# EAGLE board PCB (EAGLE 9.7.0)
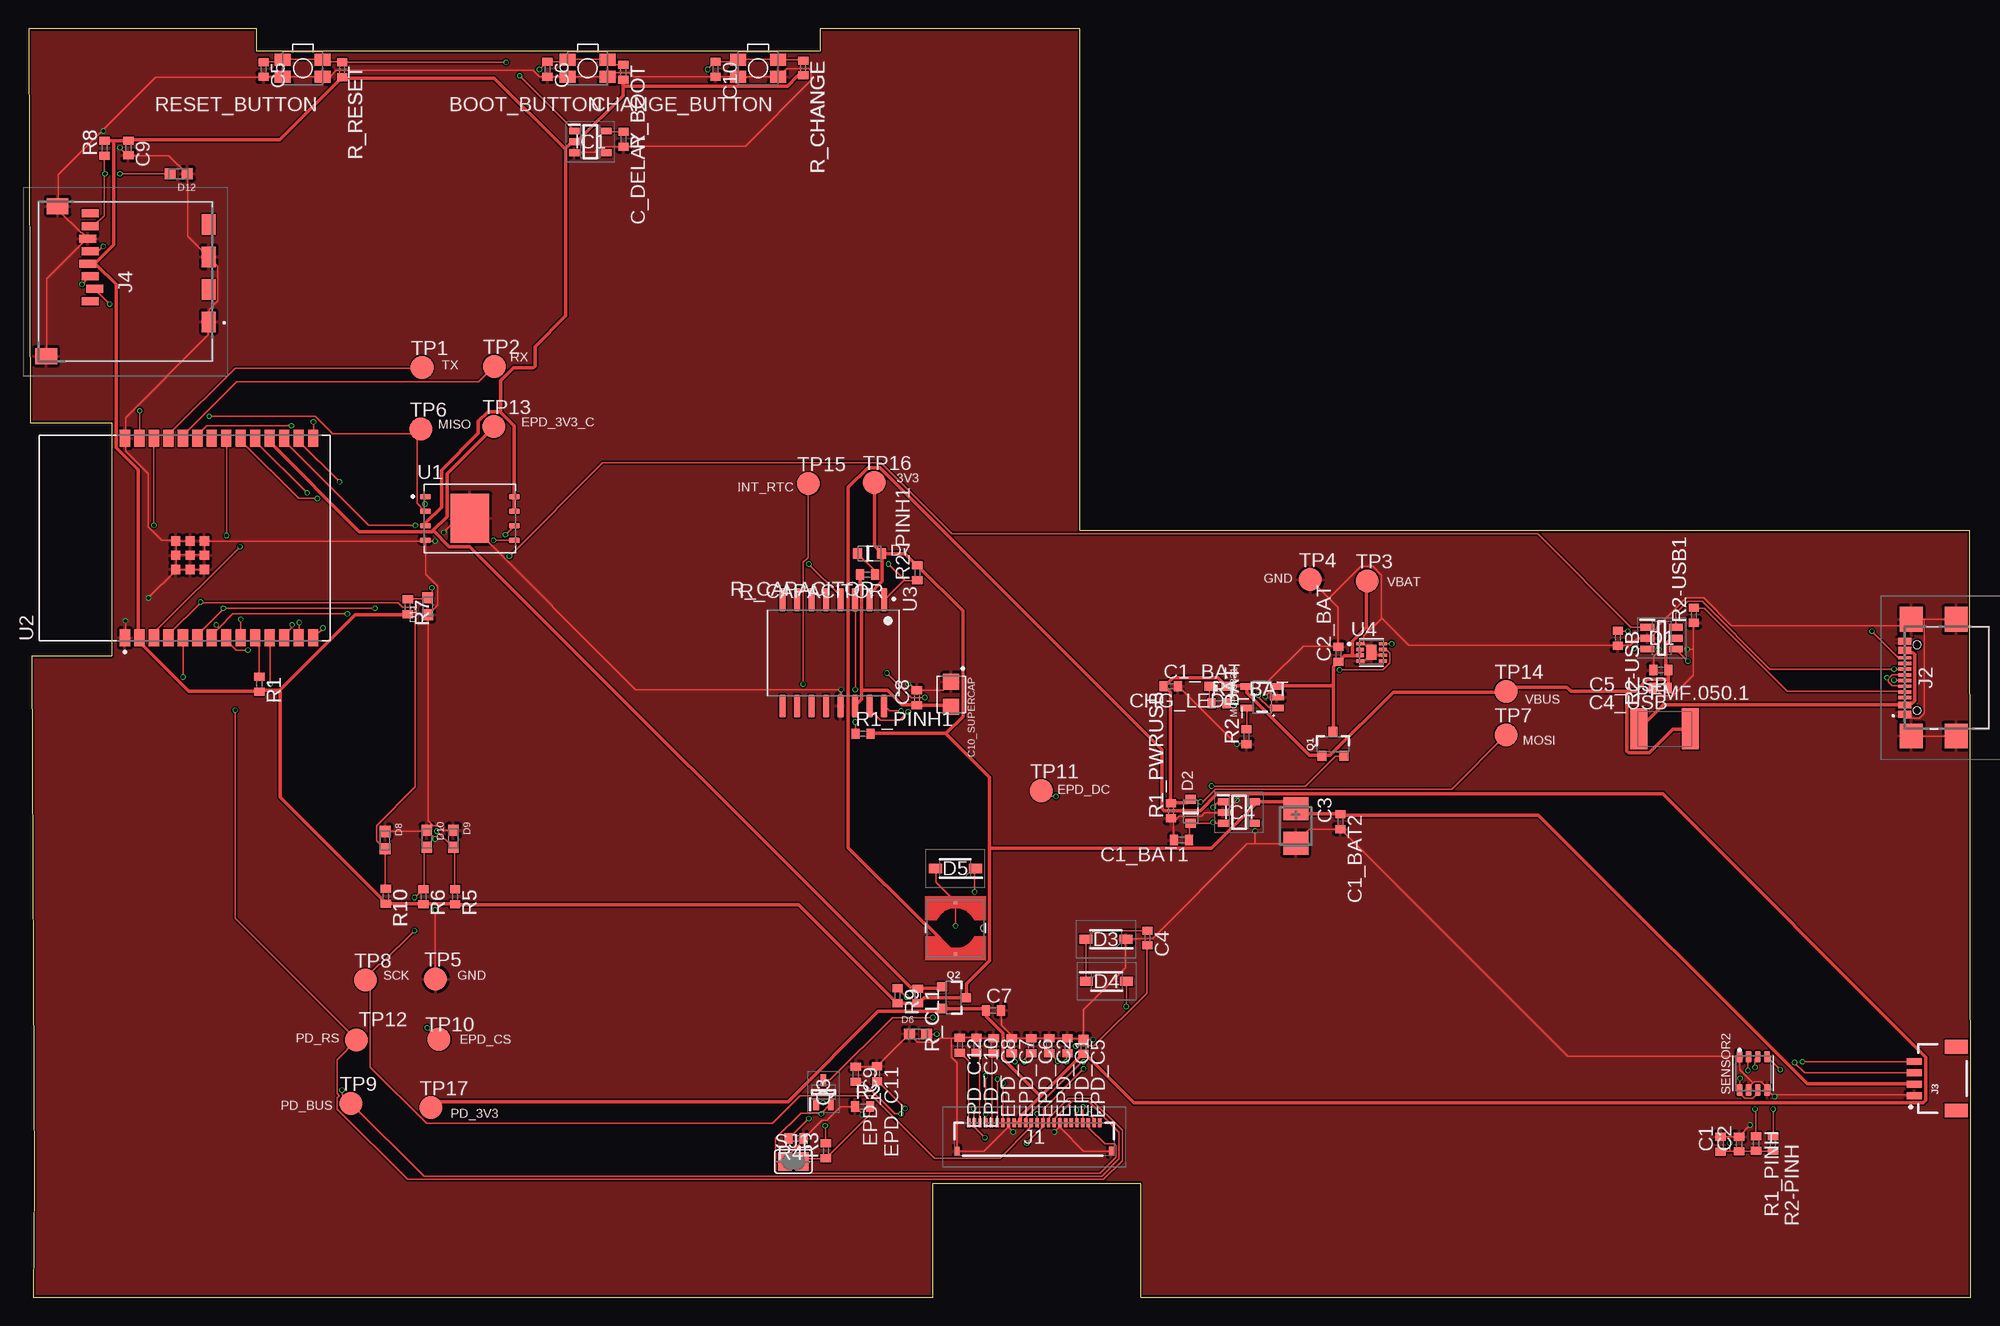
[diagram p0: board, top side]
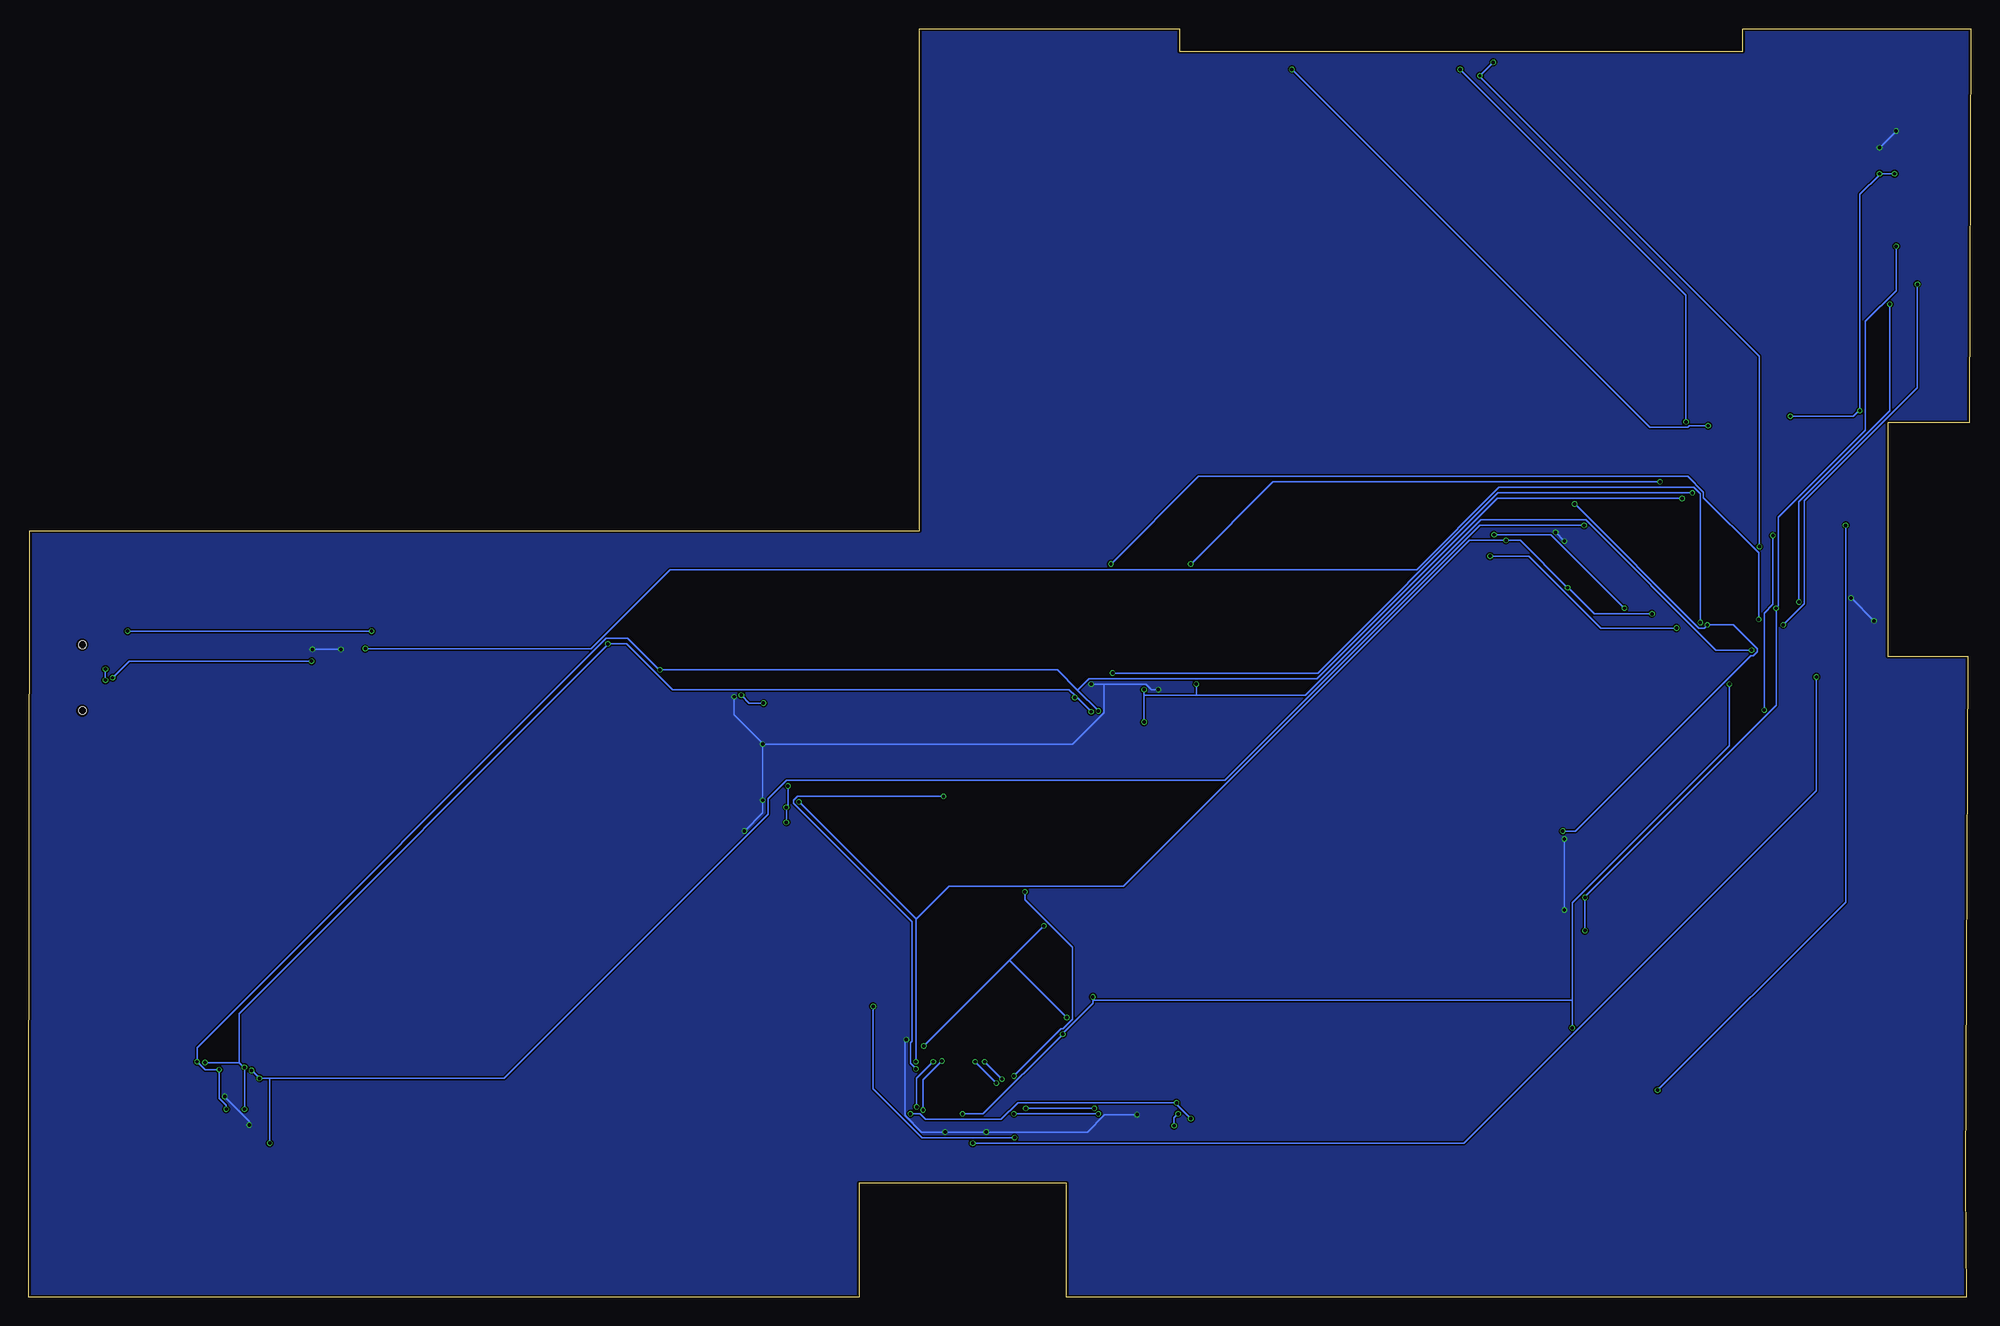
[diagram p1: board, bottom side, seen from below]

Size 170.3 x 111.2 mm. Coordinates in mm from the lower left corner, seen from the top.
Outline: 0.5,10 0.4,0 79.3,0 79.3,10 97.5,10 97.5,0 170.3,0 170.3,10 170.2,67.2 92.2,67.2 92.2,111.2 69.4,111.2 69.4,109.2 20,109.2 20,111.2 0,111.2 0.17,76.66 7.3,76.66 7.3,56.2 0.27,56.2 0.5,10
Copper layers (1*16): Top 0.035mm / dielectric 1.6mm / Bottom 0.035mm
Design rules "jlcpcb-2layers.dru": minimum track width 0.15mm, minimum drill 0.3mm, track to track 5mil, track to pad 5mil, pad to pad 5mil, via to via 5mil, smd to smd 5mil, copper to edge 0.2mm, drill to drill 6mil, minimum pad ring 10mil, minimum via ring 3mil, stop-mask expansion 4mil, vias tented up to drill 0mil, thermal gap 10mil
Net classes: 1 putere: width 0.3 mm

## Footprints (pad centres in the part's own frame; a part is rotated, then mirrored left to right if it is on the bottom)
MYBUTTON = smd 1.4 x 1.05: 1 1.75,0.75; 2 -1.75,0.75; 3 -1.75,-0.75; 4 1.75,-0.75
EAGLE-LTSPICE_C0402 = smd 0.7 x 0.9: 1 -0.65,0; 2 0.65,0
RCL_CT3528 = smd 2 x 2.2: + -1.5,0; - 1.5,0
CAPCP3225X100N = smd 1.4 x 1.4: 1 -1.1,0; 2 1.1,0
ADAFRUIT_CHIP-LED0603 = smd 0.8 x 0.8: A 0,-0.75; C 0,0.75
SOT95P280X145-6N = smd 1.2 x 0.6: 1 -1.25,0.95; 2 -1.25,0; 3 -1.25,-0.95; 4 1.25,-0.95; 5 1.25,0; 6 1.25,0.95
ESP32_WROVER_AVX---SD0805S020S1R0_AVX_SD0805S020S1R0_0 = smd 0.8 x 0.9: 1 -1.05,0; 2 1.05,0
SOD3716X135N = smd 1.15 x 0.8: 1 -1.75,0; 2 1.75,0
DIOC1608X36N = smd 0.97 x 0.94: 1 -0.75,0; 2 0.75,0
SOT95P280X125-5N = smd 0.9 x 0.6: 1 -1.4,0.95; 2 -1.4,0; 3 -1.4,-0.95; 4 1.4,-0.95; 5 1.4,0.95
SOT95P280X120-5N = smd 0.9 x 0.6: 1 -1.4,0.95; 2 -1.4,0; 3 -1.4,-0.95; 4 1.4,-0.95; 5 1.4,0.95
FH34SRJ24S05SH99 = smd 0.3 x 0.8: 1 5.75,1.45; 2 5.25,1.45; 3 4.75,1.45; 4 4.25,1.45; 5 3.75,1.45; 6 3.25,1.45; 7 2.75,1.45; 8 2.25,1.45; 9 1.75,1.45; 10 1.25,1.45; 11 0.75,1.45; 12 0.25,1.45; 13 -0.25,1.45; 14 -0.75,1.45; 15 -1.25,1.45; 16 -1.75,1.45; 17 -2.25,1.45; 18 -2.75,1.45; 19 -3.25,1.45; 20 -3.75,1.45; 21 -4.25,1.45; 22 -4.75,1.45; 23 -5.25,1.45; 24 -5.75,1.45 | smd 0.4 x 0.8: MP1 6.75,-1.05; MP2 -6.75,-1.05
SAMACSYS_PARTS_USB4110GFA = smd 0.3 x 1.15: A1 -3.35,3.678; A4 -2.55,3.678; A5 -1.25,3.678; A6 -0.25,3.678; A7 0.25,3.678; A8 1.25,3.678; A9 2.55,3.678; A12 3.35,3.678; B1 3.05,3.678; B4 2.25,3.678; B5 1.75,3.678; B6 0.75,3.678; B7 -0.75,3.678; B8 -1.75,3.678; B9 -2.25,3.678; B12 -3.05,3.678 | smd 2.18 x 2: MP1 -5.11,-0.827; MP2 5.11,-0.827; MP3 -5.11,3.103; MP4 5.11,3.103 | hole 0.65: -2.89,2.603; 2.89,2.603
JST04_1MM_RA = smd 0.6 x 1.35: 1 -1.5,0; 2 -0.5,0; 3 0.5,0; 4 1.5,0 | smd 1.2 x 2: NC1 2.8,-3.675; NC2 -2.8,-3.675
112ATAARR03ATTEND = smd 1.8 x 1.2: G1 10.6,10.4; G2 4.9,10.4; S1 7.75,10.4; S2 2.05,10.4 | smd 1.4 x 1.9: G3 13.6,-3.85; G4 0.45,-2.85 | smd 0.7 x 1.5: P1 8.8,0; P2 7.7,0.4; P3 6.6,0; P4 5.5,-0.2; P5 4.4,0; P6 3.3,-0.2; P7 2.2,0; P8 1.1,0
IND_4828-WE-TPC_WRE = smd 0.381 x 0.381: 1 -2.286,0; 2 2.286,0
ESP32_WROVER_SPARKFUN-IC-POWER_SOT23-5 = smd 0.55 x 1.2: 1 -0.95,-1.3; 2 0,-1.3; 3 0.95,-1.3; 4 0.95,1.3; 5 -0.95,1.3
ESP32C6_VARISTOR_CT/CN1812 = smd 1.5 x 3.6: 1 -2.25,0; 2 2.25,0
ESP32_WROVER_SPARKFUN-DISCRETESEMI_SOT23-3 = smd 0.8 x 0.9: 1 -0.95,-1; 2 0.95,-1; 3 0,1.1
SOT65P210X110-3N = smd 1.05 x 0.5: 1 -1.05,0.65; 2 -1.05,-0.65; 3 1.05,0
ESP32_WROVER_EAGLE-LTSPICE_R0402 = smd 0.7 x 0.9: 1 -0.65,0; 2 0.65,0
ESP32_WROVER_BME680_PSON80P300X300X100-8N = smd 1.016 x 0.5: 1 1.458,1.2; 2 1.458,0.4; 3 1.458,-0.4; 4 1.458,-1.2; 5 -1.458,-1.22; 6 -1.458,-0.4; 7 -1.458,0.4; 8 -1.458,1.2
SJ = smd 1.168 x 1.6: 1 -0.762,0; 2 0.762,0
TP20R = smd 2 x 2: TP 0,0
SON127P600X800X80-9N = smd 0.94 x 0.44: 1 -3.895,1.905; 2 -3.895,0.635; 3 -3.895,-0.635; 4 -3.895,-1.905; 5 3.895,-1.905; 6 3.895,-0.635; 7 3.895,0.635; 8 3.895,1.905 | smd 3.4 x 4.3: 9 0,0
XCVR_ESP32-C6-WROOM-1-N8 = smd 1.5 x 0.9: 1 -8.75,5.26; 2 -8.75,3.99; 3 -8.75,2.72; 4 -8.75,1.45; 5 -8.75,0.18; 6 -8.75,-1.09; 7 -8.75,-2.36; 8 -8.75,-3.63; 9 -8.75,-4.9; 10 -8.75,-6.17; 11 -8.75,-7.44; 12 -8.75,-8.71; 13 -8.75,-9.98; 14 -8.75,-11.25; 15 8.75,-11.25; 16 8.75,-9.98; 17 8.75,-8.71; 18 8.75,-7.44; 19 8.75,-6.17; 20 8.75,-4.9; 21 8.75,-3.63; 22 8.75,-2.36; 23 8.75,-1.09; 24 8.75,0.18; 25 8.75,1.45; 26 8.75,2.72; 27 8.75,3.99; 28 8.75,5.26 | smd 0.8 x 0.8: 29_1 -2.755,0.79; 29_2 -1.505,0.79; 29_3 -0.255,0.79; 29_4 -2.755,-0.46; 29_5 -1.505,-0.46; 29_6 -0.255,-0.46; 29_7 -2.755,-1.71; 29_8 -1.505,-1.71; 29_9 -0.255,-1.71
SOIC127P1032X265-16N = smd 2.05 x 0.59: 1 -4.655,4.445; 2 -4.655,3.175; 3 -4.655,1.905; 4 -4.655,0.635; 5 -4.655,-0.635; 6 -4.655,-1.905; 7 -4.655,-3.175; 8 -4.655,-4.445; 9 4.655,-4.445; 10 4.655,-3.175; 11 4.655,-1.905; 12 4.655,-0.635; 13 4.655,0.635; 14 4.655,1.905; 15 4.655,3.175; 16 4.655,4.445
SON50P200X200X80-9N = smd 0.76 x 0.27: 1 -0.985,0.75; 4 -0.985,-0.75; 5 0.985,-0.75; 6 0.985,-0.25; 7 0.985,0.25; 8 0.985,0.75 | smd 0.76 x 0.3: 2 -0.985,0.25; 3 -0.985,-0.25 | smd 0.9 x 1.3: 9 0,0

## Placement (x,y rotation side)
BOOT_BUTTON  BUTTON_CUSYOMV1  [MYBUTTON]  49.02,107.72 180 top
C1  100nF  [EAGLE-LTSPICE_C0402]  148.35,13.41 90 top
C1_BAT  4.7uF  [EAGLE-LTSPICE_C0402]  100.14,53.55 0 top
C1_BAT1  4.7uF  [EAGLE-LTSPICE_C0402]  101.08,40.07 180 top
C1_BAT2  4.7uF  [EAGLE-LTSPICE_C0402]  115.02,41.67 270 top
C2  100nF  [EAGLE-LTSPICE_C0402]  149.97,13.43 90 top
C2_BAT  4.7uF  [EAGLE-LTSPICE_C0402]  114.85,56.35 90 top
C3  100uF TANT  [RCL_CT3528]  111.11,41.3 270 top
C4  4.7uF/25V  [EAGLE-LTSPICE_C0402]  98.11,31.49 270 top
C4_USB  100nF  [EAGLE-LTSPICE_C0402]  143.07,53.39 180 top
C5  1uF  [EAGLE-LTSPICE_C0402]  20.61,107.61 270 top
C5_USB  4.7uF  [EAGLE-LTSPICE_C0402]  143.1,54.97 180 top
C6  100nF  [EAGLE-LTSPICE_C0402]  45.5,107.63 270 top
C7  10uF  [EAGLE-LTSPICE_C0402]  84.59,25.13 0 top
C8  100nF  [EAGLE-LTSPICE_C0402]  77.88,52.53 90 top
C9  100nF  [EAGLE-LTSPICE_C0402]  8.76,100.73 270 top
C10  100nF  [EAGLE-LTSPICE_C0402]  60.24,107.63 270 top
C10_SUPERCAP  CPH3225A  [CAPCP3225X100N]  80.89,52.84 270 top
C_DELAY  100nF  [EAGLE-LTSPICE_C0402]  52.17,101.49 270 top
CHANGE_BUTTON  BUTTON_CUSYOMV1  [MYBUTTON]  63.96,107.72 180 top
CHG_LED  [ADAFRUIT_CHIP-LED0603]  104.24,53.55 90 top
D1  USBLC6-2SC6Y  [SOT95P280X145-6N]  143.18,57.77 0 top
D2  ESP32_WROVER_AVX---SD0805S020S1R0_AVX_SD0805S020S1R0_0_0AVX_SD0805S020S1R0_0_0  [ESP32_WROVER_AVX---SD0805S020S1R0_AVX_SD0805S020S1R0_0]  101.89,42.58 90 top
D3  MBR0530  [SOD3716X135N]  94.46,31.37 180 top
D4  MBR0530  [SOD3716X135N]  94.52,27.68 0 top
D5  MBR0530  [SOD3716X135N]  81.26,37.58 180 top
D6  PGB1010603MR  [DIOC1608X36N]  77.98,23.07 0 top
D7  ESP32_WROVER_AVX---SD0805S020S1R0_AVX_SD0805S020S1R0_0_0AVX_SD0805S020S1R0_0_0  [ESP32_WROVER_AVX---SD0805S020S1R0_AVX_SD0805S020S1R0_0]  73.74,65.18 0 top
D8  PGB1010603MR  [DIOC1608X36N]  31.26,40.07 270 top
D9  PGB1010603MR  [DIOC1608X36N]  37.24,40.17 270 top
D10  PGB1010603MR  [DIOC1608X36N]  34.92,40.17 270 top
D11  PGB1010603MR  [DIOC1608X36N]  35,60.57 90 top
D12  PGB1010603MR  [DIOC1608X36N]  13.18,98.47 180 top
EPD_C1  1uF/50V  [EAGLE-LTSPICE_C0402]  91.08,22.05 270 top
EPD_C2  1uF/50V  [EAGLE-LTSPICE_C0402]  89.49,22.05 270 top
EPD_C5  0.1uF/50V  [EAGLE-LTSPICE_C0402]  92.5,21.99 270 top
EPD_C6  1uF/50V  [EAGLE-LTSPICE_C0402]  87.9,22.05 270 top
EPD_C7  1uF/50V  [EAGLE-LTSPICE_C0402]  86.21,22.05 270 top
EPD_C8  1uF/50V  [EAGLE-LTSPICE_C0402]  84.62,22.05 270 top
EPD_C9  1uF/50V  [EAGLE-LTSPICE_C0402]  72.53,19.55 270 top
EPD_C10  1uF/50V  [EAGLE-LTSPICE_C0402]  83.11,22.09 270 top
EPD_C11  1uF/50V  [EAGLE-LTSPICE_C0402]  74.39,19.59 270 top
EPD_C12  1uF/50V  [EAGLE-LTSPICE_C0402]  81.65,22.09 270 top
IC1  BD5229G-TR  [SOT95P280X125-5N]  49.25,101.27 0 top
IC4  XC6220A331MR-G  [SOT95P280X120-5N]  106.13,42.49 0 top
J1  FH34SRJ-24S-0.5SH_99_  [FH34SRJ24S05SH99]  88.17,13.84 0 top
J2  SAMACSYS_PARTS_USB4110-GF-A  [SAMACSYS_PARTS_USB4110GFA]  168.17,54.3 90 top
J3  QWIIC_RIGHT_ANGLE  [JST04_1MM_RA]  165.33,19.16 90 top
J4  112A-TAAR-R03_ATTEND  [112ATAARR03ATTEND]  5.4,96.09 270 top
L1  68uH  [IND_4828-WE-TPC_WRE]  81.27,32.35 270 top
MCP73831  ESP32_WROVER_SPARKFUN-IC-POWER_MCP73831  [ESP32_WROVER_SPARKFUN-IC-POWER_SOT23-5]  108.15,52.59 90 top
PFMF.050.1  ESP32C6_VARISTORCN1812  [ESP32C6_VARISTOR_CT/CN1812]  143.44,49.82 0 top
Q1  20V/4.2A/52mΩ/1.4W  [ESP32_WROVER_SPARKFUN-DISCRETESEMI_SOT23-3]  114.36,48.46 0 top
Q2  20V/4.2A/52mΩ/1.4W  [ESP32_WROVER_SPARKFUN-DISCRETESEMI_SOT23-3]  81.08,26.26 270 top
Q3  SI1308EDL-T1-GE3  [SOT65P210X110-3N]  69.69,17.98 90 top
R1  10K  [ESP32_WROVER_EAGLE-LTSPICE_R0402]  20.25,53.73 270 top
R1_BAT  200  [ESP32_WROVER_EAGLE-LTSPICE_R0402]  104.36,52.05 0 top
R1_PINH  10K  [ESP32_WROVER_EAGLE-LTSPICE_R0402]  151.46,13.47 270 top
R1_PINH1  10K  [ESP32_WROVER_EAGLE-LTSPICE_R0402]  73.15,49.39 0 top
R1_PWRUSB  100K  [ESP32_WROVER_EAGLE-LTSPICE_R0402]  100.15,42.64 90 top
R2  2.2  [ESP32_WROVER_EAGLE-LTSPICE_R0402]  73.13,16.71 0 top
R2-PINH  10K  [ESP32_WROVER_EAGLE-LTSPICE_R0402]  152.94,13.47 270 top
R2-PINH1  10K  [ESP32_WROVER_EAGLE-LTSPICE_R0402]  77.93,63.49 90 top
R2-USB  5k1  [ESP32_WROVER_EAGLE-LTSPICE_R0402]  139.34,57.77 270 top
R2-USB1  5k1  [ESP32_WROVER_EAGLE-LTSPICE_R0402]  146,59.77 90 top
R2_BAT  2K  [ESP32_WROVER_EAGLE-LTSPICE_R0402]  106.78,49.13 90 top
R3  0.47  [ESP32_WROVER_EAGLE-LTSPICE_R0402]  69.91,12.83 90 top
R4  10K  [ESP32_WROVER_EAGLE-LTSPICE_R0402]  67.29,13.91 180 top
R5  10K  [ESP32_WROVER_EAGLE-LTSPICE_R0402]  37.41,35.11 270 top
R6  10K  [ESP32_WROVER_EAGLE-LTSPICE_R0402]  34.63,35.11 270 top
R7  10K  [ESP32_WROVER_EAGLE-LTSPICE_R0402]  33.25,60.51 270 top
R8  10K  [ESP32_WROVER_EAGLE-LTSPICE_R0402]  6.67,100.71 90 top
R9  10K  [ESP32_WROVER_EAGLE-LTSPICE_R0402]  76.19,26.41 270 top
R10  10K  [ESP32_WROVER_EAGLE-LTSPICE_R0402]  31.33,35.13 270 top
R_BOOT  10K  [ESP32_WROVER_EAGLE-LTSPICE_R0402]  52.15,107.37 270 top
R_CAPACITOR  15  [ESP32_WROVER_EAGLE-LTSPICE_R0402]  73.55,63.34 180 top
R_CHANGE  10K  [ESP32_WROVER_EAGLE-LTSPICE_R0402]  67.92,107.74 270 top
R_CL1  10K  [ESP32_WROVER_EAGLE-LTSPICE_R0402]  77.96,26.4 270 top
R_RESET  10K  [ESP32_WROVER_EAGLE-LTSPICE_R0402]  27.49,107.59 270 top
RESET_BUTTON  BUTTON_CUSYOMV1  [MYBUTTON]  24.05,107.72 180 top
SENSOR2  BME688  [ESP32_WROVER_BME680_PSON80P300X300X100-8N]  151.21,19.62 90 top
SJ1  [SJ]  67.06,11.89 0 top
TP1  TPTP20R  [TP20R]  34.51,81.49 0 top
TP2  TPTP20R  [TP20R]  40.82,81.6 0 top
TP3  TPTP20R  [TP20R]  117.35,62.79 0 top
TP4  TPTP20R  [TP20R]  112.37,62.89 0 top
TP5  TPTP20R  [TP20R]  35.69,27.89 0 top
TP6  TPTP20R  [TP20R]  34.41,76.09 0 top
TP7  TPTP20R  [TP20R]  129.53,49.29 0 top
TP8  TPTP20R  [TP20R]  29.55,27.79 0 top
TP9  TPTP20R  [TP20R]  28.27,16.99 0 top
TP10  TPTP20R  [TP20R]  35.98,22.61 0 top
TP11  TPTP20R  [TP20R]  88.79,44.39 0 top
TP12  TPTP20R  [TP20R]  28.73,22.56 0 top
TP13  TPTP20R  [TP20R]  40.78,76.31 0 top
TP14  TPTP20R  [TP20R]  129.53,53.11 0 top
TP15  TPTP20R  [TP20R]  68.38,71.31 0 top
TP16  TPTP20R  [TP20R]  74.13,71.41 0 top
TP17  TPTP20R  [TP20R]  35.28,16.61 0 top
U1  W25Q512JVEIQ  [SON127P600X800X80-9N]  38.69,68.26 0 top
U2  ESP32-C6-WROOM-1-N8  [XCVR_ESP32-C6-WROOM-1-N8]  13.71,66.54 90 top
U3  DS3231SN#  [SOIC127P1032X265-16N]  70.55,56.48 270 top
U4  MAX17048G+T10  [SON50P200X200X80-9N]  117.74,56.52 0 top

## Library data of the parts
BOOT_BUTTON CHANGE_BUTTON CHG_LED PFMF.050.1 RESET_BUTTON SJ1 TP1-TP17 = DeskAssistant v19 v1
C1 C1_BAT C1_BAT1 C1_BAT2 C2 C2_BAT C4 C4_USB C5 C5_USB C6-C10 C_DELAY EPD_C1 EPD_C2 EPD_C5-EPD_C12 = DeskAssistant v19 v1; SPICEMODEL: NONE; SPICEPREFIX: C
C3 = DeskAssistant v19 v1; SPICEPREFIX: C
C10_SUPERCAP = DeskAssistant v19 v1; AVAILABILITY: Not in stock; CHECK_PRICES: https://www.snapeda.com/parts/CPH3225A/Seiko+Instruments/view-part/?ref=eda; DESCRIPTION: 11 mF (EDLC) Supercapacitor 3.3 V 1210 (3225 Metric) - -; MF: Seiko Instruments; MP: CPH3225A; PACKAGE: 1210 Seiko; PRICE: None; PURCHASE-URL: https://www.snapeda.com/api/url_track_click_mouser/?unipart_id=562593&manufacturer=Seiko Instruments&part_name=CPH3225A&search_term=None; SNAPEDA_LINK: https://www.snapeda.com/parts/CPH3225A/Seiko+Instruments/view-part/?ref=snap
D1 = DeskAssistant v19 v1; AVAILABILITY: In Stock; CHECK_PRICES: https://www.snapeda.com/parts/USBLC6-2SC6Y/STMicroelectronics/view-part/?ref=eda; DESCRIPTION: 17V Clamp 5A (8/20µs) Ipp Tvs Diode Surface Mount SOT-23-6; MF: STMicroelectronics; MP: USBLC6-2SC6Y; PACKAGE: SOT-23-6 STMicroelectronics; PRICE: None; SNAPEDA_LINK: https://www.snapeda.com/parts/USBLC6-2SC6Y/STMicroelectronics/view-part/?ref=snap
D2 D7 = DeskAssistant v19 v1; CENTROID_NOT_SPECIFIED: No; CODE: SD0805S020S1R0; DATASHEET: http://datasheets.avx.com/schottky.pdf; DIGIKEY_DESCRIPTION: DIODE SCHOTTKY 20V 1A 0805; DIGIKEY_PART_NUMBER: 478-7800-1-ND; LEAD_FREE: yes; MF: AVX; MOUSER_PART_NUMBER: 581-SD0805S020S1R0; PACKAGE: 0805 (2012 metric); PREFIX: D; ROHS: yes; TEMPERATURE_RANGE_HIGH: +125°C; TEMPERATURE_RANGE_LOW: -55°C
D3-D5 = DeskAssistant v19 v1; AVAILABILITY: In Stock; CHECK_PRICES: https://www.snapeda.com/parts/MBR0530/Onsemi/view-part/?ref=eda; DESCRIPTION: Diode Schottky 30 V 500mA Surface Mount SOD-123; MF: ON Semiconductor; MP: MBR0530; PACKAGE: SOD-123-2 ON Semiconductor; PRICE: None; PURCHASE-URL: https://www.snapeda.com/api/url_track_click_mouser/?unipart_id=179458&manufacturer=ON Semiconductor&part_name=MBR0530&search_term=None; SNAPEDA_LINK: https://www.snapeda.com/parts/MBR0530/Onsemi/view-part/?ref=snap
D6 D8-D12 = DeskAssistant v19 v1; AVAILABILITY: In Stock; CHECK_PRICES: https://www.snapeda.com/parts/PGB1010603MR/Littelfuse/view-part/?ref=eda; DESCRIPTION: 150V (Typ) Clamp - Ipp Tvs Diode Surface Mount 0603 (1608 Metric); MF: Littelfuse Inc.; MP: PGB1010603MR; PACKAGE: 0603 Littelfuse Inc.; PRICE: None; PURCHASE-URL: https://www.snapeda.com/api/url_track_click_mouser/?unipart_id=5659453&manufacturer=Littelfuse Inc.&part_name=PGB1010603MR&search_term=None; SNAPEDA_LINK: https://www.snapeda.com/parts/PGB1010603MR/Littelfuse/view-part/?ref=snap
IC1 = DeskAssistant v19 v1; DESCRIPTION: Voltage Detector with Adjustable Delay Time: CMOS processes are utilized to develop high precision, low current consumption CMOS reset ICs that allow arbitrary setting of the delay time. The extensive lineup includes both Nch Open Drain and CMOS output types in a wide range of detection voltages (from 2.3V to 6.0V, in 0.1V steps), enabling selection of the ideal solution based on customer requirements. In addition, the entire series is of course both lead-free and RoHS-compliant.; HEIGHT: 1.25mm; MANUFACTURER_NAME: ROHM Semiconductor; MANUFACTURER_PART_NUMBER: BD5229G-TR; MOUSER_PART_NUMBER: 755-BD5229G-TR; MOUSER_PRICE-STOCK: https://www.mouser.co.uk/ProductDetail/ROHM-Semiconductor/BD5229G-TR?qs=4kLU8WoGk0vvnhrrYwdszw%3D%3D
IC4 = DeskAssistant v19 v1; DESCRIPTION: LDO Voltage Regulators; HEIGHT: 1.2mm; MANUFACTURER_NAME: Torex; MANUFACTURER_PART_NUMBER: XC6220A331MR-G; MOUSER_PART_NUMBER: 865-XC6220A331MR-G; MOUSER_PRICE-STOCK: https://www.mouser.co.uk/ProductDetail/Torex-Semiconductor/XC6220A331MR-G?qs=AsjdqWjXhJ8ZSWznL1J0gg%3D%3D
J1 = DeskAssistant v19 v1; DESCRIPTION: 24 Position FFC, FPC Connector Contacts, Top and Bottom 0.020" (0.50mm) Surface Mount, Right Angle; HEIGHT: 1.1mm; MANUFACTURER_NAME: Hirose; MANUFACTURER_PART_NUMBER: FH34SRJ-24S-0.5SH(99); MOUSER_PART_NUMBER: 798-FH34SRJ24S05SH99; MOUSER_PRICE-STOCK: https://www.mouser.co.uk/ProductDetail/Hirose-Connector/FH34SRJ-24S-0.5SH99?qs=vcbW%252B4%252BSTIpKBl5ap9J8Fw%3D%3D
J2 = DeskAssistant v19 v1; DESCRIPTION: CONN USB 2.0 TYPE-C R/A SMT; HEIGHT: 3.26mm; MANUFACTURER_NAME: GCT (GLOBAL CONNECTOR TECHNOLOGY); MANUFACTURER_PART_NUMBER: USB4110-GF-A; MOUSER_PART_NUMBER: 640-USB4110-GF-A; MOUSER_PRICE-STOCK: https://www.mouser.co.uk/ProductDetail/GCT/USB4110-GF-A?qs=KUoIvG%2F9IlYiZvIXQjyJeA%3D%3D
J3 = DeskAssistant v19 v1; PROD_ID: CONN-13694
J4 = DeskAssistant v19 v1; DESCRIPTION: Micro SD Card Socket, Push-Push Type, Top Mount, SMT, H=1.83mm, 10u; HEIGHT: 1.9mm; MANUFACTURER_NAME: ATTEND; MANUFACTURER_PART_NUMBER: 112A-TAAR-R03 ATTEND
L1 = DeskAssistant v19 v1; COPYRIGHT: Copyright (C) 2024 Ultra Librarian. All rights reserved.; MANUFACTURER_PART_NUMBER: 744043680; MFR_NAME: Wurth Electronics
MCP73831 = DeskAssistant v19 v1; PROD_ID: IC-09995
Q1 Q2 = DeskAssistant v19 v1; CODE: DMG2305UX-7; PROD_ID: TRAN-14388
Q3 = DeskAssistant v19 v1; AVAILABILITY: In Stock; CHECK_PRICES: https://www.snapeda.com/parts/SI1308EDL-T1-GE3/Vishay+Siliconix/view-part/?ref=eda; DESCRIPTION: Si1308EDL-T1-GE3 N-channel MOSFET Transistor, 1.5 A, 30 V, 3-Pin SC-70 | Siliconix / Vishay SI1308EDL-T1-GE3; MF: Vishay Siliconix; MP: SI1308EDL-T1-GE3; PACKAGE: SOT-323 Vishay Semiconductor; PRICE: None; PURCHASE-URL: https://www.snapeda.com/api/url_track_click_mouser/?unipart_id=274603&manufacturer=Vishay Siliconix&part_name=SI1308EDL-T1-GE3&search_term=None; SNAPEDA_LINK: https://www.snapeda.com/parts/SI1308EDL-T1-GE3/Vishay+Siliconix/view-part/?ref=snap
R1 R1_BAT R1_PINH R1_PINH1 R1_PWRUSB R2 R2-PINH R2-PINH1 R2-USB R2-USB1 R2_BAT R3-R10 R_BOOT R_CAPACITOR R_CHANGE R_CL1 R_RESET = DeskAssistant v19 v1; SPICEMODEL: NONE; SPICEPREFIX: R
SENSOR2 = DeskAssistant v19 v1; AVAILABILITY: Unavailable; DESCRIPTION: Integrated Environmental Unit; MF: Bosch Sensortec; MP: BME680; PACKAGE: LGA-8 Bosch Tools; PRICE: None
U1 = DeskAssistant v19 v1; AVAILABILITY: In Stock; CHECK_PRICES: https://www.snapeda.com/parts/W25Q512JVEIQ/Winbond+Electronics/view-part/?ref=eda; DESCRIPTION: FLASH - NOR Memory IC 512Mb (64M x 8) SPI - Quad I/O 133 MHz 8-WSON (8x6); MF: Winbond Electronics; MP: W25Q512JVEIQ; PACKAGE: Package; PRICE: None; SNAPEDA_LINK: https://www.snapeda.com/parts/W25Q512JVEIQ/Winbond+Electronics/view-part/?ref=snap
U2 = DeskAssistant v19 v1; AVAILABILITY: In Stock; CHECK_PRICES: https://www.snapeda.com/parts/ESP32-C6-WROOM-1-N8/Espressif+Systems/view-part/?ref=eda; DESCRIPTION: Multiprotocol Modules ESP32-C6 module, Wi-Fi 6 in 2.4 GHz band, Bluetooth 5, Zigbee 3.0 and Thread. ESP34-WROOM Compatible - ENGINEERING SAMPLE; MF: Espressif Systems; MP: ESP32-C6-WROOM-1-N8; PACKAGE: None; PRICE: None; SNAPEDA_LINK: https://www.snapeda.com/parts/ESP32-C6-WROOM-1-N8/Espressif+Systems/view-part/?ref=snap
U3 = DeskAssistant v19 v1; AVAILABILITY: In Stock; CHECK_PRICES: https://www.snapeda.com/parts/DS3231SN%23/Analog+Devices/view-part/?ref=eda; DESCRIPTION: Extremely Accurate I²C-Integrated RTC/TCXO/Crystal; MF: Analog Devices; MP: DS3231SN#; PACKAGE: SOIC-16 Maxim; PRICE: None; PURCHASE-URL: https://www.snapeda.com/api/url_track_click_mouser/?unipart_id=99048&manufacturer=Analog Devices&part_name=DS3231SN#&search_term=None; SNAPEDA_LINK: https://www.snapeda.com/parts/DS3231SN%23/Analog+Devices/view-part/?ref=snap
U4 = DeskAssistant v19 v1; AVAILABILITY: In Stock; CHECK_PRICES: https://www.snapeda.com/parts/MAX17048G+T10/Analog+Devices/view-part/?ref=eda; DESCRIPTION: 3µA 1-Cell/2-Cell Fuel Gauge with ModelGauge; MF: Analog Devices; MP: MAX17048G+T10; PACKAGE: TDFN-8 Maxim; PRICE: None; PURCHASE-URL: https://www.snapeda.com/api/url_track_click_mouser/?unipart_id=329239&manufacturer=Analog Devices&part_name=MAX17048G+T10&search_term=None; SNAPEDA_LINK: https://www.snapeda.com/parts/MAX17048G+T10/Analog+Devices/view-part/?ref=snap

## Nets
3V3 [putere]: C1_BAT2.1 C3.+ C9.1 D7.2 IC1.2 IC4.5 J3.2 J4.P4 Q2.3 R1.2 R1_PINH1.2 R2-PINH1.2 R5.2 R6.2 R7.2 R8.2 R9.2 R10.2 R_BOOT.2 R_CHANGE.2 R_CL1.2 R_RESET.2 TP16.TP U1.3 U1.7 U1.8 U2.2 U3.2
32KHZ: R2-PINH1.1 U2.9 U3.1
DN: D1.4 J2.A7 J2.B7
DP: D1.6 J2.A6 J2.B6
EPD_3V3 [putere]: C7.1 EPD_C5.2 J1.15 J1.16 L1.2 Q2.2 TP17.TP
EPD_3V3_C [putere]: Q2.1 R_CL1.1 TP13.TP U2.18
EPD_BUSY: J1.9 TP9.TP U2.26
EPD_CS: D6.2 J1.12 R9.1 TP10.TP U2.11
EPD_DC: J1.11 TP11.TP U2.5
EPD_RST: J1.10 TP12.TP U2.21
FLASH_CS: D9.2 R5.1 U1.1 U2.12
GDR: J1.2 Q3.1 R4.2
GND: BOOT_BUTTON.1 BOOT_BUTTON.2 C1.2 C1_BAT1.2 C1_BAT2.2 C1_BAT.2 C2.2 C2_BAT.2 C3.- C4_USB.2 C5.2 C5_USB.2 C6.2 C7.2 C8.2 C9.2 C10.2 C10_SUPERCAP.1 C_DELAY.2 CHANGE_BUTTON.1 CHANGE_BUTTON.2 D1.2 D3.1 D6.1 D8.1 D9.1 D10.1 D11.1 D12.1 EPD_C1.1 EPD_C2.1 EPD_C5.1 EPD_C6.1 EPD_C7.1 EPD_C8.1 EPD_C9.1 EPD_C10.1 EPD_C11.1 EPD_C12.1 IC1.3 IC4.2 J1.8 J1.17 J1.MP1 J1.MP2 J2.A1 J2.A12 J2.B1 J2.B12 J2.MP1 J2.MP2 J2.MP3 J2.MP4 J3.1 J4.G1 J4.G2 J4.G3 J4.G4 J4.P6 MCP73831.2 R1_PWRUSB.1 R2-USB1.1 R2-USB.2 R2.1 R2_BAT.1 R4.1 RESET_BUTTON.1 RESET_BUTTON.2 SENSOR2.1 SENSOR2.5 SENSOR2.7 SJ1.1 TP4.TP TP5.TP U1.4 U1.9 U2.1 U2.28 U2.29_1 U2.29_2 U2.29_3 U2.29_4 U2.29_5 U2.29_6 U2.29_7 U2.29_8 U2.29_9 U3.13 U4.1 U4.4 U4.6 U4.9
GPIO8: R1.1 U2.10
I2C_PW: C1.1 C2.1 R1_PINH.2 R2-PINH.2 SENSOR2.2 SENSOR2.6 SENSOR2.8 U2.17
INT_RTC: R1_PINH1.1 TP15.TP U2.8 U3.3
IO/BOOT: BOOT_BUTTON.3 BOOT_BUTTON.4 C6.1 R_BOOT.1 U2.15
IO/CHANGE: C10.1 CHANGE_BUTTON.3 CHANGE_BUTTON.4 R_CHANGE.1 U2.23
MISO: D12.2 J4.P7 R8.1 TP6.TP U1.2 U2.27
MOSI: D11.2 J1.14 J4.P3 R7.1 TP7.TP U1.5 U2.7
N$1: J2.A5 R2-USB1.2
N$2: J2.B5 R2-USB.1
N$4: C1_BAT1.1 D2.1 IC4.1 IC4.3 Q1.2
N$12: C4.1 D3.2 D4.1
N$20: MCP73831.5 R2_BAT.2
N$22: MCP73831.1 R1_BAT.2
N$23: CHG_LED.C R1_BAT.1
N$49: EPD_C12.2 J1.24
N$50: EPD_C6.2 J1.18
N$51: EPD_C7.2 J1.19
N$52: EPD_C8.2 J1.20
N$54: EPD_C10.2 J1.22
N$63: EPD_C2.2 J1.5
N$64: EPD_C1.2 J1.4
N$76: C_DELAY.1 IC1.5
N$95: D7.1 R_CAPACITOR.1
PREVGH: D5.1 EPD_C9.2 J1.21
PREVGL: D4.2 EPD_C11.2 J1.23
RESE: J1.3 Q3.2 R3.2
RESE': R2.2 R3.1 SJ1.2
RESET: C5.1 IC1.1 R_RESET.1 RESET_BUTTON.3 RESET_BUTTON.4 U2.3
RTC_RST: U2.16 U3.4
RX: TP2.TP U2.24
SCK: D10.2 J1.13 J4.P5 R6.1 TP8.TP U1.6 U2.6
SCL: J3.4 R2-PINH.1 SENSOR2.4 U2.20 U3.16 U4.7
SDA: J3.3 R1_PINH.1 SENSOR2.3 U2.19 U3.15 U4.8
SRC: C4.2 D5.2 L1.1 Q3.3
SS_SD: D8.2 J4.P2 R10.1 U2.4
TX: TP1.TP U2.25
USB_D+: D1.1 U2.14
USB_D-: D1.3 U2.13
VBAT [putere]: C2_BAT.1 MCP73831.3 Q1.3 TP3.TP U4.2 U4.3
VBUS [putere]: C1_BAT.1 C4_USB.1 C5_USB.1 CHG_LED.A D1.5 D2.2 MCP73831.4 PFMF.050.1.2 Q1.1 R1_PWRUSB.2 TP14.TP
VRTC [putere]: C8.1 C10_SUPERCAP.2 R_CAPACITOR.2 U3.14
VUSB [putere]: J2.A4 J2.A9 J2.B4 J2.B9 PFMF.050.1.1

## Tracks (layer width: path | path; a pad name or v marks a point on that pad's centre or on a via)
3V3
  Top 0.3: 22.01,53.18 28.65,59.83 33.23,59.83 R7.2 | 22.01,53.18 20.34,53.18 R1.2 20.2,53.12 14.04,53.12 9.75,57.41 9.75,57.76 U2.2 9.61,57.89 9.61,72.5 7.67,74.44 7.67,88.78 5.94,90.51 J4.P4 5.25,90.65 5.87,90.65 7.46,92.24 7.46,101.38 | 22.01,53.18 22.07,53.05 22.07,43.84 31.29,34.62 R10.2 31.35,34.49 34.54,34.49 R6.2 34.68,34.49 37.38,34.49 R5.2 37.52,34.42 67.5,34.42 76.09,25.83 R9.2 76.23,25.76 R_CL1.2 78.1,25.83 78.51,26.25 82.12,26.25 Q2.3 82.25,26.38 82.25,27.49 84.26,29.5 84.26,39.33 | 7.46,101.38 8.71,101.38 C9.1 8.85,101.45 22.01,101.45 27.48,106.92 R_RESET.2 27.61,106.85 40.84,106.85 46.94,100.76 47.07,100.69 | 7.46,101.38 6.7,101.38 R8.2 | 41.33,77.63 42.57,76.38 42.57,70.22 U1.8 42.57,70.01 42.57,68.9 U1.7 | U1.3 34.82,67.66 34.82,67.86 36.2,69.25 36.2,72.48 39.44,75.71 39.44,76.77 40.29,77.63 41.33,77.63 | 52.13,106.16 52.13,106.71 R_BOOT.2 | 52.13,106.16 52.13,105.33 48.11,101.31 47.91,101.31 IC1.2 47.7,101.24 47.63,101.24 47.07,100.69 | 52.13,106.16 66.53,106.16 67.43,107.06 67.92,107.06 R_CHANGE.2 | 47.07,100.69 47.07,86.01 44.39,83.33 44.39,81.61 44.23,81.45 42.52,81.45 41.4,80.33 41.4,77.77 41.33,77.63 | 80.45,49.44 73.81,49.44 R1_PINH1.2 | 80.45,49.44 81.91,50.9 81.91,60.18 77.96,64.13 R2-PINH1.2 77.82,64.19 76.85,65.16 74.84,65.16 D7.2 | TP16.TP 74.15,71.4 74.15,65.86 74.71,65.3 D7.2 | U3.2 73.74,61.63 74.84,62.74 74.84,65.03 D7.2 | 84.26,39.33 84.26,45.57 80.52,49.31 80.45,49.44 | J3.2 165.28,18.7 155.94,18.7 132.39,42.24 115.15,42.24 C1_BAT2.1 115.01,42.38 111.55,42.38 111.2,42.73 C3.+ 111.06,42.87 110.51,43.42 107.6,43.42 IC4.5 107.67,43.28 103.72,39.33 84.26,39.33
32KHZ  (via drill 0.3)
  Top 0.15: 76.78,62.81 76.71,62.81 75.05,61.15 U3.1 | 76.78,62.81 77.89,62.81 R2-PINH1.1 | v18.61,59.42 18.61,57.82 U2.9 | v75.4,64.26 76.78,62.88 76.78,62.81
  Bottom 0.15: v18.61,59.42 18.61,65.23 23.46,70.08 23.46,70.57 24.84,71.95 67.71,71.95 v75.4,64.26
DN  (via drill 0.3)
  Top 0.15: 163.07,54.22 163.07,53.95 163.41,53.6 164.45,53.6 J2.B7 | 163.07,54.22 163.41,54.57 164.45,54.57 J2.A7 | v145.48,55.75 144.44,56.78 D1.4 | v162.93,54.29 163,54.22 163.07,54.22
  Bottom 0.15: v145.48,55.75 161.48,55.75 v162.93,54.29
DP  (via drill 0.3)
  Top 0.15: v163.55,54.08 164.45,54.08 J2.A6 | J2.B6 164.45,55.05 v163.55,55.05 152.68,55.05 146.72,61.01 145.48,61.01 144.44,59.97 D1.6
  Bottom 0.15: v163.55,55.05 v163.55,54.08
EPD_3V3
  Top 0.3: J1.16 86.48,15.3 86.89,15.3 J1.15 86.96,15.44 86.96,15.86 88.73,17.62 | 88.73,17.62 92.43,21.33 EPD_C5.2 92.64,21.33 96.93,17.04 166.12,17.04 166.32,17.24 166.32,21.05 143.26,44.11 104.21,44.11 102.75,42.66 99.57,42.66 99.36,42.87 99.36,47.99 74.64,72.71 73.6,72.71 71.87,70.98 71.87,39.4 78.51,32.76 78.58,32.76 81.22,30.12 L1.2 | 88.73,17.62 85.44,20.91 85.44,23.13 83.98,24.58 83.98,25 C7.1 83.92,25.14 83.78,25.28 80.11,25.28 Q2.2 79.97,25.21 79.83,25.07 74.5,25.07 66.58,17.15 35.82,17.15 TP17.TP
EPD_3V3_C
  Top 0.3: Q2.1 80.04,27.15 79.97,27.08 77.96,27.08 R_CL1.1 77.82,27.15 77.34,27.15 38.7,65.79 36.89,65.79 35.48,67.21 | 35.48,67.21 36.69,68.42 36.69,72.16 40.77,76.24 TP13.TP | 35.48,67.21 35.37,67.1 29,67.1 21.17,74.93 21.17,75.28 U2.18
EPD_BUSY  (via drill 0.3)
  Top 0.15: J1.9 89.94,15.3 89.94,15.65 91.46,17.17 92.92,17.17 95.62,14.47 95.62,12.12 94.09,10.6 34.68,10.6 28.31,16.97 TP9.TP 28.24,17.04 27.48,17.8 v27.48,18.14 | v11,67.66 11,75.28 U2.26
  Bottom 0.15: v11,67.66 11,34.62 v27.48,18.14
EPD_CS  (via drill 0.3)
  Top 0.15: v88.42,16.07 88.42,15.3 J1.12 | v79.62,23.06 78.79,23.06 D6.2 | v76.99,26.32 76.92,26.32 76.23,27.01 R9.1 | v21.17,53.74 21.17,57.76 U2.11 | v34.96,23.61 35.92,22.64 TP10.TP
  Bottom 0.15: v88.42,16.07 86.62,16.07 v79.62,23.06 79.62,23.13 76.99,25.76 76.99,26.04 | 76.99,26.04 v76.99,26.32 | v21.17,53.74 21.17,48.34 34.96,34.56 34.96,26.04 | v34.96,23.61 34.96,26.04 | 34.96,26.04 76.99,26.04
EPD_DC  (via drill 0.3)
  Top 0.15: v92.5,20.01 88.97,16.48 88.97,15.3 J1.11 88.9,15.23 88.9,14.89 v87.52,13.5 | v90.08,43.9 89.32,43.9 88.83,44.39 TP11.TP | v13.56,54.36 13.56,57.76 U2.5
  Bottom 0.15: v92.5,20.01 92.99,20.5 92.99,22.3 92.85,22.44 92.85,32.89 103.24,43.28 103.24,43.56 102.89,43.9 v90.08,43.9 | v13.56,54.36 13.56,44.39 44.44,13.5 v87.52,13.5
EPD_RST  (via drill 0.3)
  Top 0.15: J1.10 89.46,15.3 89.46,15.72 91.19,17.45 93.06,17.45 95.9,14.61 95.9,11.98 94.23,10.32 33.24,10.32 27.07,16.49 27.07,17.49 27.23,17.65 27.2,17.68 27.2,17.7 27.05,17.86 27.05,20.83 28.72,22.51 TP12.TP 28.73,22.63 18.13,33.23 v18.13,51.45 | v17.37,66.76 17.37,75.28 U2.21
  Bottom 0.15: v17.37,66.76 17.37,60.73 18.13,59.97 v18.13,51.45
FLASH_CS  (via drill 0.3)
  Top 0.15: R5.1 37.38,35.8 37.38,39.27 37.24,39.4 D9.2 37.17,39.47 v35.79,40.86 | v34.75,69.53 34.75,70.15 U1.1 | v23.11,58.93 23.11,58.72 22.42,58.03 22.42,57.82 U2.12
  Bottom 0.15: v34.75,69.53 23.88,58.66 23.39,58.66 v23.11,58.93 20.83,58.93 18.75,56.85 18.75,56.58 19.1,56.23 19.3,56.23 34.68,40.86 v35.79,40.86
GDR  (via drill 0.3)
  Top 0.15: v92.99,16.07 93.4,15.65 93.4,15.3 J1.2 | v69.65,17.04 69.17,17.04 69.1,16.97 Q3.1 | v68.4,15.65 66.67,13.92 R4.2
  Bottom 0.15: v92.99,16.07 92.16,16.07 91.67,15.58 85.02,15.58 83.57,17.04 v69.65,17.04 69.72,16.97 v68.4,15.65
GND  (via drill 0.3)
  Top 0.15: IC1.3 47.91,100.34 49.64,100.34 50.12,100.83 52.13,100.83 C_DELAY.2 52.2,100.9 62.86,100.9 68.61,106.64 68.61,107.55 68.47,107.68 66.46,107.68 65.77,106.99 CHANGE_BUTTON.2 65.7,106.99 62.24,106.99 CHANGE_BUTTON.1 62.17,106.99 60.3,106.99 C10.2 60.16,106.99 53.03,106.99 52.68,107.34 51.16,107.34 50.81,106.99 BOOT_BUTTON.2 50.74,106.99 47.28,106.99 BOOT_BUTTON.1 47.21,106.99 45.55,106.99 C6.2 45.48,106.99 44.79,106.99 44.23,107.55 26.99,107.55 26.44,106.99 25.81,106.99 RESET_BUTTON.2 25.75,106.99 22.35,106.99 RESET_BUTTON.1 22.28,106.99 20.62,106.99 C5.2 20.55,106.92 11.13,106.92 6.53,102.32 | J4.G3 1.58,82.55 1.58,89.26 5.11,92.8 J4.P6 5.18,92.8 4.69,93.28 4.62,93.28 2.62,95.29 2.62,95.63 J4.G4 2.62,95.7 2.62,98.4 6.53,102.32 | U2.29_1 12.93,63.78 14.11,63.78 U2.29_4 14.18,63.78 15.36,63.78 U2.29_7 | v8.5,59.28 8.5,57.82 U2.1 | v10.51,61.29 12.93,63.71 U2.29_1 | U2.29_2 12.93,65.09 12.93,66.27 U2.29_3 | U2.29_2 13,65.09 14.11,65.09 U2.29_5 14.18,65.09 15.36,65.09 U2.29_8 15.43,65.09 15.43,66.27 U2.29_9 15.5,66.27 34.75,66.27 U1.4 | U2.29_6 14.11,66.27 13,66.27 U2.29_3 | U2.29_3 12.87,66.34 11.69,66.34 10.51,67.52 10.51,72.16 8.5,74.17 8.5,75.28 U2.28 8.5,75.34 8.5,77.08 15.77,84.35 15.77,85.45 J4.G1 15.84,85.52 15.84,86.56 16.6,87.32 16.6,90.37 15.84,91.13 J4.G2 15.77,91.2 13.97,93 13.97,98.4 D12.1 13.9,98.47 12.31,100.07 8.78,100.07 C9.2 8.71,100.07 v8.02,100.76 | U2.29_1 12.93,63.85 12.93,64.96 U2.29_2 | U1.4 34.82,66.34 34.82,63.36 35.86,62.33 35.86,60.66 35.02,59.83 D11.1 35.02,59.76 35.02,41.76 35.37,41.41 35.37,41.34
  Top 0.15: D8.1 31.29,40.86 34.89,40.86 D10.1 | 35.37,41.34 35.92,41.34 36.34,40.93 37.17,40.93 D9.1 | 35.37,41.34 34.96,40.93 D10.1 | v35.65,33.93 35.65,27.91 TP5.TP | v35.65,40.16 34.96,40.86 D10.1 | v36.41,67.03 37.59,68.21 38.63,68.21 U1.9 38.63,68.14 38.63,67.86 53.24,53.25 v71.24,53.25 71.24,51.87 U3.13 | v35.65,66.27 34.89,66.27 U1.4 | v6.56,102.21 6.56,102.28 6.53,102.32 | J2.B12 164.52,51.24 164.52,50.97 J2.A1 164.52,50.9 164.52,50.76 | 164.52,50.76 164.52,49.72 165.01,49.24 J2.MP3 165.15,49.17 168.95,49.17 J2.MP1 | J2.B1 164.52,57.41 164.52,57.62 J2.A12 164.52,57.69 164.52,58.86 J2.MP4 | 166.19,59.42 J2.MP4 | 166.19,59.42 168.95,59.42 J2.MP2 | 164.52,50.76 165.77,50.76 166.19,51.18 166.19,59.42 | 145.96,56.78 145.96,59.07 R2-USB1.1 | 145.96,56.78 145.96,54.5 144.16,52.7 143.26,52.7 142.57,53.39 142.43,53.39 C4_USB.2 | 142.78,56.78 142.78,57.2 142.22,57.76 141.95,57.76 D1.2 | 142.78,56.78 142.78,56.44 142.5,56.16 142.5,54.98 C5_USB.2 | D1.2 141.88,57.76 141.05,57.76 140.42,57.13 139.39,57.13 R2-USB.2 139.32,57.13 121.03,57.13 118.68,59.49 118.61,59.49 | U4.4 116.81,55.82 117.16,55.82 117.71,56.37 117.71,56.51 U4.9 | U4.9 117.78,56.58 117.09,57.27 116.81,57.27 U4.1 117.09,57.34 117.09,57.96 118.61,59.49 | U4.6 118.68,56.3 117.71,56.3 U4.9 | 114.01,61.25 112.38,62.88 TP4.TP | 114.01,61.25 114.8,60.45 114.8,57.06 C2_BAT.2 114.73,57.06 111.75,57.06 108.64,53.95 108.64,53.18 108.81,53.01 | 108.81,53.01 109.19,52.63 109.4,52.63 MCP73831.2 | 118.61,59.49 118.61,63.29 117.85,64.06 116.81,64.06 114.01,61.25 | v145.41,56.78 145.96,56.78 | v142.92,56.78 142.78,56.78 | J2.MP4 164.45,58.86 149.29,58.86 146.86,61.29 145.34,61.29 142.78,58.72 142.78,58.38 142.22,57.82 D1.2
  Top 0.15: C10_SUPERCAP.1 80.87,53.88 80.18,53.18 C8.2 77.82,53.18 77.27,53.74 v77.13,53.74 | C1_BAT1.2 100.4,40.1 100.4,41.76 100.19,41.97 R1_PWRUSB.1 100.47,41.76 100.88,42.17 102.82,42.17 103.1,42.45 104.69,42.45 IC4.2 104.76,42.52 104.9,42.52 v105.94,43.56 | 105.94,48.54 105.8,48.54 100.81,53.53 C1_BAT.2 | 105.94,48.54 106.77,48.54 R2_BAT.1 | v105.94,48.48 105.94,48.54 | SJ1.1 66.33,11.91 66.33,12.12 67.92,13.71 67.92,13.85 R4.1 67.99,13.92 69.58,15.51 70,15.51 71.17,16.69 72.42,16.69 R2.1 72.49,16.69 73.11,16.07 v73.11,16 | 90.43,14.89 92.5,12.81 94.86,12.81 J1.MP1 | 90.43,14.89 90.43,15.23 J1.8 | 85.85,14.89 83.78,12.81 81.42,12.81 J1.MP2 81.42,12.88 81.42,20.57 80.94,21.05 80.94,22.71 | 85.85,14.89 85.85,15.23 J1.17 | EPD_C8.1 84.61,22.71 83.15,22.71 EPD_C10.1 83.08,22.78 81.7,22.78 EPD_C12.1 81.63,22.71 80.94,22.71 | EPD_C9.1 72.56,20.22 74.36,20.22 EPD_C11.1 74.43,20.29 77.2,23.06 D6.1 77.27,23.06 77.96,22.37 79.55,22.37 79.9,22.71 80.94,22.71 | v89.94,14.47 90.36,14.89 90.43,14.89 | v86.34,14.47 85.92,14.89 85.85,14.89 | C1.2 148.39,14.06 149.91,14.06 C2.2 149.98,14.13 v150.95,15.1 | 151.19,18.8 151.3,18.91 151.92,18.91 152.4,18.42 152.4,18.21 SENSOR2.5 152.47,18.14 152.89,17.73 153.1,17.73 | 151.19,18.8 150.81,18.42 150.81,18.21 SENSOR2.7 | 151.19,18.8 150.05,19.94 150.05,21.05 SENSOR2.1 149.98,21.12 134.95,21.12 115.08,41 C1_BAT2.2 115.01,41 112.31,41 111.13,39.82 C3.- 111.06,39.75 107.53,39.75 | 153.1,17.73 165.28,17.73 J3.1 | v153.1,17.59 153.1,17.73 | C7.2 85.3,25.07 85.3,23.82 86.34,22.78 EPD_C7.1 86.27,22.71 87.86,22.71 EPD_C6.1 87.93,22.71 89.46,22.71 EPD_C2.1 89.53,22.71 91.05,22.71 EPD_C1.1 91.12,22.64 92.43,22.64 EPD_C5.1
  Top 0.15: EPD_C5.1 92.5,22.71 92.5,25.21 96.17,28.88 96.17,31.3 D3.1 96.24,31.37 96.31,31.44 98.53,31.44 106.84,39.75 107.53,39.75 | v93.33,22.58 92.5,22.58 EPD_C5.1 | 107.53,39.75 v107.53,40.86 | v108.43,52.63 108.81,53.01
  Bottom 0.15: v10.51,61.29 v8.5,59.28 | v35.65,40.16 v35.65,33.93 | v35.65,66.27 v36.41,67.03 | v8.02,100.76 v6.56,102.21 | v142.92,56.78 v145.41,56.78 | v71.24,53.25 71.87,53.25 72.35,53.74 76.02,53.74 | v77.13,53.74 76.02,53.74 | v105.94,48.48 v105.94,43.56 105.94,42.45 v107.53,40.86 | 76.02,53.74 76.02,51.24 78.79,48.48 v105.94,48.48 | v73.11,16 75.95,16 77.48,14.47 v86.34,14.47 v89.94,14.47 92.02,14.47 93.47,15.93 93.47,22.44 v93.33,22.58 | v150.95,15.1 150.95,15.44 v153.1,17.59 | v108.43,52.63 108.43,51.04 105.94,48.54 v105.94,48.48
  pour Top: -8.07,-20.62 214.47,-20.62 214.92,-20.17 214.92,136.02 -10.42,136.02 -10.42,-18.27
  pour Bottom: -11.07,-23.02 215.27,-23.02 217.02,-21.27 217.02,136.52 -11.77,136.52 -12.12,136.17 -12.12,-21.97
GPIO8
  Top 0.15: R1.1 20.2,54.43 20.2,57.48 19.93,57.76 U2.10
I2C_PW  (via drill 0.3)
  Top 0.15: R2-PINH.2 152.89,12.81 151.5,12.81 R1_PINH.2 151.43,12.81 149.98,12.81 C2.1 149.91,12.81 149.15,12.81 | 149.15,12.81 148.39,12.81 C1.1 | SENSOR2.6 151.57,18.14 151.57,17.87 151.16,17.45 150.47,17.45 150.05,17.87 150.05,18.14 SENSOR2.8 150.05,18.21 v150.05,19.18 | v150.74,19.88 150.74,21.05 SENSOR2.2 | v33.92,67.66 29.83,67.66 22.42,75.07 22.42,75.28 U2.17 | v149.15,13.5 149.15,12.81
  Bottom 0.15: v150.74,19.88 v150.05,19.18 149.15,19.18 | v33.92,67.66 43.06,67.66 65.43,45.29 103.86,45.29 105.45,43.7 105.45,42.31 128.58,19.18 149.15,19.18 | 149.15,19.18 v149.15,13.5
INT_RTC  (via drill 0.3)
  Top 0.15: v72.49,50.41 72.49,49.44 R1_PINH1.1 | v72.49,53.25 72.49,61.08 U3.3 | v19.24,56.72 18.2,56.72 17.37,57.55 17.37,57.76 U2.8 | v67.92,53.74 67.92,64.4 68.33,64.82 68.33,71.26 TP15.TP
  Bottom 0.15: v72.49,53.25 72.49,52.77 | 72.49,52.77 v72.49,50.41 | v19.24,56.72 22.35,56.72 33.78,68.14 42.99,68.14 58.36,52.77 67.92,52.77 | 72.49,52.77 67.92,52.77 | 67.92,52.77 v67.92,53.74
IO/BOOT  (via drill 0.3)
  Top 0.15: R_BOOT.1 52.13,108.03 51.23,108.03 50.81,108.44 BOOT_BUTTON.3 50.74,108.52 47.28,108.52 BOOT_BUTTON.4 47.21,108.44 47.07,108.31 45.55,108.31 C6.1 45.48,108.31 v44.79,107.61 | v24.98,76.73 24.98,75.34 U2.15
  Bottom 0.15: v24.98,76.73 24.98,87.81 v44.79,107.61
IO/CHANGE  (via drill 0.3)
  Top 0.15: R_CHANGE.1 67.92,108.44 65.77,108.44 CHANGE_BUTTON.3 65.7,108.52 62.24,108.52 CHANGE_BUTTON.4 62.17,108.44 62.03,108.31 60.3,108.31 C10.1 60.23,108.31 v59.54,107.61 | v23.04,76.38 15.63,76.38 14.8,75.55 14.8,75.34 U2.23
  Bottom 0.15: v23.04,76.38 24.71,76.38 24.84,76.24 28.17,76.24 v59.54,107.61
MISO  (via drill 0.3)
  Top 0.15: U1.2 34.75,68.9 34.06,69.6 34.06,75.69 34.4,76.04 TP6.TP 33.99,75.69 26.65,75.69 25.12,77.21 v15.84,77.21 | 6.63,98.47 6.63,94.8 5.73,93.9 5.46,93.9 J4.P7 | 6.63,98.47 6.63,100 R8.1 | v8.02,98.47 12.38,98.47 D12.2 | v6.7,98.47 6.63,98.47 | v9.75,77.7 9.75,75.34 U2.27
  Bottom 0.15: v6.7,98.47 v8.02,98.47 8.02,98.4 9.75,96.67 v9.75,77.7 9.82,77.7 10.3,77.21 v15.84,77.21
MOSI  (via drill 0.3)
  Top 0.15: R7.1 33.29,61.22 34.89,61.22 34.96,61.29 D11.2 35.02,61.35 35.37,61.7 v35.37,62.19 | v40.77,66.34 42.57,66.34 U1.5 | 16.71,58.69 17.92,59.9 v27.96,59.9 | 16.71,58.69 16.12,58.1 16.12,57.82 U2.7 | v4.69,88.78 5.39,89.47 J4.P3 | 16.71,58.69 v16.47,58.93 | v92.5,20.64 92.36,20.64 87.45,15.72 87.45,15.3 J1.14 | v102.75,43.42 102.96,43.42 104.07,44.53 124.77,44.53 129.48,49.24 TP7.TP
  Bottom 0.15: v27.96,59.9 33.02,59.9 35.3,62.19 v35.37,62.19 39.53,66.34 v40.77,66.34 43.96,66.34 74.29,36.01 89.59,36.01 92.43,33.17 92.5,33.17 | v4.69,88.78 4.69,79.71 14.6,69.8 14.6,60.8 v16.47,58.93 | 92.5,33.17 v92.5,20.64 | v102.75,43.42 92.5,33.17
N$1
  Top 0.15: R2-USB1.2 146.03,60.39 146.93,60.39 154.2,53.12 164.45,53.12 J2.A5
N$2  (via drill 0.3)
  Top 0.15: v140.22,58.38 139.39,58.38 R2-USB.1 | v161.61,58.38 163.9,56.09 164.45,56.09 J2.B5
  Bottom 0.15: v161.61,58.38 v140.22,58.38
N$4  (via drill 0.3)
  Top 0.15: C1_BAT1.1 101.78,40.1 101.78,41.41 101.85,41.48 D2.1 101.92,41.55 103.86,41.55 | 103.86,41.55 104.69,41.55 IC4.3 | v103.86,42.94 104.34,43.42 104.69,43.42 IC4.1 | v103.86,41.62 103.86,41.55 | v103.72,44.8 111.96,44.8 114.59,47.44 115.29,47.44 Q1.2
  Bottom 0.15: v103.86,41.62 v103.86,42.94 103.86,43 103.72,43.14 v103.72,44.8
N$12
  Top 0.15: C4.1 98.04,32.13 93.47,32.13 D3.2 92.71,31.3 92.71,27.7 D4.1
N$20
  Top 0.15: R2_BAT.2 106.84,49.79 106.84,51.59 MCP73831.5
N$22  (via drill 0.3)
  Top 0.15: v105.87,52.08 105.04,52.08 R1_BAT.2 | v107.81,52.77 107.81,52.63 108.78,51.66 109.4,51.66 MCP73831.1
  Bottom 0.15: v105.87,52.08 107.11,52.08 v107.81,52.77
N$23
  Top 0.15: CHG_LED.C 103.51,53.53 103.51,52.22 103.65,52.08 R1_BAT.1
N$49
  Top 0.15: J1.24 82.39,15.3 82.39,20.71 81.7,21.4 EPD_C12.2
N$50  (via drill 0.3)
  Top 0.15: v85.44,18.77 85.44,15.3 J1.18 | v87.31,20.64 87.31,20.84 87.86,21.4 EPD_C6.2
  Bottom 0.15: v87.31,20.64 v85.44,18.77
N$51  (via drill 0.3)
  Top 0.15: v84.95,19.11 84.95,15.3 J1.19 | v86.48,20.64 86.48,21.19 86.27,21.4 EPD_C7.2
  Bottom 0.15: v86.48,20.64 v84.95,19.11
N$52
  Top 0.15: J1.20 84.47,15.3 84.47,21.26 84.61,21.4 EPD_C8.2
N$54
  Top 0.15: J1.22 83.36,15.3 83.36,21.19 83.15,21.4 EPD_C10.2
N$63  (via drill 0.3)
  Top 0.15: v91.88,16.41 91.88,15.3 J1.5 | v90.22,20.71 89.53,21.4 EPD_C2.2
  Bottom 0.15: v91.88,16.41 91.88,19.04 v90.22,20.71
N$64  (via drill 0.3)
  Top 0.15: v92.43,16.69 92.43,15.3 J1.4 | v90.98,20.64 90.98,21.33 91.05,21.4 EPD_C1.2
  Bottom 0.15: v92.43,16.69 92.43,19.18 v90.98,20.64
N$76
  Top 0.15: C_DELAY.1 52.13,102.14 50.74,102.14 50.68,102.21 IC1.5
N$95
  Top 0.15: R_CAPACITOR.1 74.15,63.36 74.15,63.71 72.7,65.16 D7.1
PREVGH  (via drill 0.3)
  Top 0.15: v76.51,16.07 75.95,16.07 73.18,18.84 72.56,18.84 EPD_C9.2 | J1.21 83.92,15.3 v83.92,16.07 v83.92,19.39 | v82.95,35.52 82.95,37.53 D5.1
  Bottom 0.15: v76.51,16.07 v83.92,16.07 | v82.95,35.52 82.95,34.83 78.79,30.68 78.79,24.38 79.62,23.55 79.76,23.55 v83.92,19.39
PREVGL  (via drill 0.3)
  Top 0.15: v82.88,16.55 82.88,15.3 J1.23 82.95,15.23 82.95,14.89 v83.85,13.99 | v76.85,16.55 74.43,18.97 EPD_C11.2 | v96.24,25.48 96.24,27.63 D4.2
  Bottom 0.15: v76.85,16.55 v82.88,16.55 | v96.24,25.48 96.24,18.28 91.95,13.99 v83.85,13.99
RESE  (via drill 0.3)
  Top 0.15: 69.51,16.14 67.71,16.14 65.5,13.92 65.5,11.01 65.63,10.87 93.96,10.87 95.34,12.26 95.34,13.3 95.2,13.43 94.37,13.43 92.99,14.82 92.99,15.23 J1.3 | 69.51,16.14 70.27,16.9 Q3.2 | v69.86,15.03 69.86,13.5 R3.2 | v69.51,16.07 69.51,16.14
  Bottom 0.15: v69.86,15.03 69.86,15.72 v69.51,16.07
RESE'
  Top 0.15: SJ1.2 67.85,11.91 68.06,12.12 69.86,12.12 R3.1 69.93,12.19 73.74,16 73.74,16.69 R2.2
RESET  (via drill 0.3)
  Top 0.15: C5.1 20.62,108.31 22.14,108.31 22.28,108.44 RESET_BUTTON.4 22.35,108.52 25.75,108.52 RESET_BUTTON.3 25.81,108.44 25.95,108.31 27.48,108.31 R_RESET.1 27.55,108.24 v41.88,108.24 | v43.06,107.06 47.84,102.28 IC1.1 | v18.54,65.79 11,58.24 11,57.82 U2.3
  Bottom 0.15: v41.88,108.24 v43.06,107.06 43.06,106.99 18.54,82.48 v18.54,65.79
RTC_RST  (via drill 0.3)
  Top 0.15: v27.27,71.47 23.74,75 23.74,75.28 U2.16 | v68.4,64.26 71.17,61.49 71.17,61.15 U3.4
  Bottom 0.15: v27.27,71.47 61.2,71.47 v68.4,64.26
RX
  Top 0.15: U2.24 13.56,75.34 13.56,75.55 18.27,80.26 39.46,80.26 40.77,81.58 TP2.TP
SCK  (via drill 0.3)
  Top 0.15: v41.81,66.83 42.57,67.59 U1.6 | 17.16,60.39 v30.38,60.39 | 17.16,60.39 14.8,58.03 14.8,57.82 U2.6 | v6.56,92.1 6.22,91.76 5.46,91.76 J4.P5 | v17.09,60.39 17.16,60.39 | D10.2 34.89,39.4 34.68,39.2 34.68,35.8 R6.1 34.61,35.73 33.92,35.04 v33.85,35.04 | J1.13 87.86,15.23 87.86,14.89 85.16,12.19 79.41,12.19 73.94,17.66 67.64,17.66 65.21,15.23 34.89,15.23 29.97,20.15 29.97,27.35 29.55,27.77 TP8.TP 29.55,27.98 30.74,29.17 30.89,29.17 v33.85,32.13
  Bottom 0.15: v41.81,66.83 36.82,66.83 v30.38,60.39 | v6.56,92.1 6.56,88.22 9.26,85.52 9.26,75.97 16.88,68.35 16.88,60.59 v17.09,60.39 17.09,51.87 33.85,35.11 v33.85,35.04 v33.85,32.13
SCL  (via drill 0.3)
  Top 0.15: v152.96,16.48 152.96,14.13 R2-PINH.1 | v153.58,19.94 152.47,21.05 SENSOR2.4 | v155.52,20.64 165.28,20.64 J3.4 | v114.94,54.98 118.75,54.98 119.37,55.61 119.37,56.44 119.09,56.72 118.75,56.72 U4.7 | v76.51,51.38 75.47,51.38 75.05,51.8 U3.16 | v25.33,70.01 23.67,70.01 18.61,75.07 18.61,75.28 U2.20
  Bottom 0.15: v152.96,16.48 152.96,16.83 153.58,17.45 v153.58,19.94 154.83,19.94 v155.52,20.64 155.52,21.88 119.65,57.76 117.78,57.76 115.01,54.98 v114.94,54.98 80.11,54.98 78.34,53.22 | v76.51,51.38 78.34,53.22 | v25.33,70.01 41.53,70.01 57.32,54.22 77.34,54.22 78.34,53.22
SDA  (via drill 0.3)
  Top 0.15: v151.37,16.48 151.43,16.41 151.43,14.13 R1_PINH.1 | v151.37,20.15 151.37,20.84 151.57,21.05 SENSOR2.3 | v154.83,20.57 155.73,19.67 165.28,19.67 J3.3 | v119.51,57.27 118.75,57.27 U4.8 | v77.13,51.31 76.37,50.55 74.71,50.55 73.74,51.52 73.74,51.8 U3.15 | v24.43,70.5 19.93,75 19.93,75.28 U2.19 | v75.26,54.71 77.41,52.56 v78.58,52.56
  Bottom 0.15: v151.37,16.48 v151.37,20.15 151.43,20.15 151.85,20.57 | 151.85,20.57 v154.83,20.57 | v77.13,51.31 78.48,52.66 | 78.48,52.66 79.07,53.25 113.83,53.25 117.85,57.27 v119.51,57.27 119.51,57.2 151.85,24.86 151.85,20.57 | v24.43,70.5 41.46,70.5 57.25,54.71 v75.26,54.71 | 78.48,52.66 v78.58,52.56
SRC  (via drill 0.3)
  Top 0.15: v91.81,22.02 93.4,22.02 98.04,26.66 98.04,30.82 C4.2 | v81.28,32.55 81.28,34.62 L1.1 81.22,34.69 79.55,36.36 79.55,37.53 D5.2 | v79.28,24.52 75.74,24.52 70.27,19.04 69.72,19.04 Q3.3
  Bottom 0.15: v81.28,32.55 84.3,29.54 | 84.3,29.54 v91.81,22.02 | 84.3,29.54 v79.28,24.52
SS_SD  (via drill 0.3)
  Top 0.15: R10.1 31.29,35.8 31.29,39.27 D8.2 31.22,39.33 30.52,40.03 30.52,41.34 33.92,44.74 33.92,60.32 33.78,60.45 32.81,60.45 32.39,60.87 15.08,60.87 | 15.08,60.87 12.31,58.1 12.31,57.82 U2.4 | v7.12,87.05 5.8,88.36 J4.P2 | v15.08,60.94 15.08,60.87
  Bottom 0.15: v7.12,87.05 7.12,77.7 15.08,69.73 v15.08,60.94
TX
  Top 0.15: U2.25 12.31,75.34 12.31,75.62 18.13,81.44 34.47,81.44 TP1.TP
USB_D+  (via drill 0.3)
  Top 0.15: v42.16,64.96 50.33,73.13 74.74,73.13 80.98,66.89 132.32,66.89 140.49,58.72 141.88,58.72 D1.1 | v25.81,58.66 24.98,57.82 U2.14
  Bottom 0.15: v42.16,64.96 38.76,64.96 32.46,58.66 v25.81,58.66
USB_D-  (via drill 0.3)
  Top 0.15: v140.77,56.85 141.88,56.85 D1.3 | v23.74,59.14 23.74,57.82 U2.13
  Bottom 0.15: v140.77,56.85 120.96,56.85 114.04,63.78 48.6,63.78 41.4,70.98 24.29,70.98 23.74,70.43 v23.74,59.14
VBAT
  Top 0.3: U4.2 116.74,56.72 116.74,56.3 U4.3 116.6,56.23 116.05,56.23 | 114.39,53.6 114.39,55.26 114.8,55.68 C2_BAT.1 114.94,55.82 115.36,56.23 116.05,56.23 | 114.39,53.6 114.39,49.58 Q1.3 | 114.39,53.6 109.47,53.6 MCP73831.3 | 116.05,56.23 116.05,57.48 117.29,58.72 117.29,62.74 TP3.TP
VBUS
  Top 0.3: D2.2 101.85,43.63 101.57,43.35 100.19,43.35 R1_PWRUSB.2 100.12,43.49 100.12,53.05 99.71,53.46 C1_BAT.1 99.5,53.6 99.64,53.6 100.33,54.29 104.28,54.29 104.9,53.67 CHG_LED.A 105.04,53.6 106.84,53.6 MCP73831.4 106.84,53.39 106.84,52.98 112.31,47.51 113.35,47.51 Q1.1 113.55,47.51 114.11,47.51 119.65,53.05 129.41,53.05 TP14.TP 129.87,53.45 134.87,53.45 135.21,53.12 140.15,53.12 | 143.75,54.15 143.75,54.91 C5_USB.1 143.68,55.05 143.54,55.19 143.54,57.27 144.03,57.76 144.37,57.76 D1.5 | 143.75,54.15 143.75,53.46 C4_USB.1 | 140.15,53.12 140.91,53.12 141.95,54.15 143.75,54.15 | 140.15,53.12 140.15,47.85 140.28,47.71 142.09,47.71 144.16,49.79 145.69,49.79 PFMF.050.1.2
VRTC
  Top 0.3: C10_SUPERCAP.2 80.87,51.8 80.8,51.87 77.89,51.87 C8.1 77.75,51.94 76.58,51.94 75.33,53.18 73.04,53.18 | 73.04,53.18 73.04,52.42 72.49,51.87 U3.14 | 73.04,53.18 73.04,62.26 72.91,62.39 72.91,63.29 R_CAPACITOR.2
VUSB
  Top 0.3: J2.A4 164.52,51.8 164.52,52.01 J2.B9 | J2.A9 164.52,56.78 164.52,56.58 J2.B4 164.66,56.51 165.22,56.51 165.35,56.37 165.35,52.28 165.15,52.08 164.66,52.08 J2.B9 | J2.B9 164.38,51.94 143.33,51.94 141.25,49.86 PFMF.050.1.1

## Text on the board
tPlace: RX | TX | MISO | EPD_3V3_C | INT_RTC | 3V3 | GND | VBAT | VBUS | MOSI | EPD_DC | SCK | GND | PD_RS | EPD_CS | PD_BUS | PD_3V3